# Altium PCB PCB1.PcbDoc
Units mm, origin at the board's own origin, x right, y up, seen from the top; angles counter-clockwise.
Board outline 14 x 6.25 mm, 2 copper layers (Top Layer, Bottom Layer); 3 components, 8 nets, 16 pads, 0 vias.
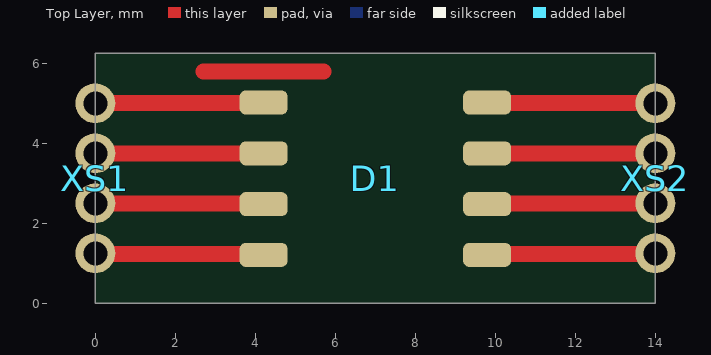
[diagram p0: Top Layer view]
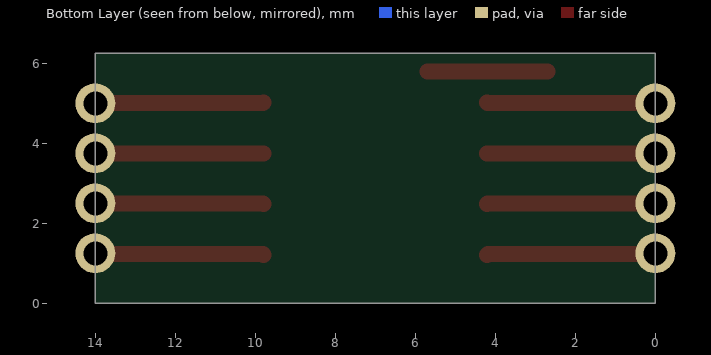
[diagram p1: Bottom Layer view, seen from below]

## Layer stack, top to bottom
Top Solder: solder mask 0.0102, Solder Resist, Dk 3.5
Top Layer: signal copper 0.0356
Dielectric 1: dielectric 0.32, FR-4, Dk 4.8
Bottom Layer: signal copper 0.0356
Bottom Solder: solder mask 0.0102, Solder Resist, Dk 3.5

## Board outline
0,0 0,6.25 14,6.25 14,0

## Design rules (kind name [scope] priority, off if disabled: settings)
Clearance [All] p1: gap=0.25 ignorepadtopadclearanceinfootprint=FALSE except(0: Arc-Hole Track-Hole SMDPad-Hole THPad-Hole Via-Hole Fill-Hole Poly-Hole Region-Hole Text-Hole)
PolygonConnect [All] p1: connectstyle=Relief reliefconductorwidth=0.254 reliefentries=4 polygonreliefangle="90 Angle" airgapwidth=0.254
RoutingVias [All] p1: holewidth=0.711 width=1.27 viastyle="Through Hole" minholewidth=0.711 minwidth=1.27 maxholewidth=0.711 maxwidth=1.27
SolderMaskExpansion [All] p1: expansion=0.102 istentingtop=FALSE
Width [All] p1: maxlimit=0.4 minlimit=0.254 preferedwidth=0.254 minimp=50.000000 maximp=50.000000 favimp=50.000000
30 further rules are at their usual default settings.

## Components (designator, comment, footprint, x,y, rotation, side; value= is the part's Value field where it differs from the comment)
D1 "ADM3485EARZ" "SO-8 (no silk)" 7,3.115 r0 top
XS1 "XS4" hole_0.6_1x4 0,5 r0 top
XS2 "XS4" hole_0.6_1x4 14,5 r0 top

## Footprints (in the part's own frame and the unit in brackets; to place one, negate y for a bottom-side part, rotate by r counter-clockwise, add the part's x,y. Pads: shape width x height; smd on the part's side, far side on the other; paste and mask are expansions set on the pad)
hole_0.6_1x4 [mm]
  round 1 hole 0.6: 1(0,0) 2(0,-1.25) 3(0,-2.5) 4(0,-3.75)
"SO-8 (no silk)" [mm]
  rrect50% 1.2x0.6 smd: 1(-2.794,1.905) 2(-2.794,0.635) 3(-2.794,-0.635) 4(-2.794,-1.905) 5(2.794,-1.905) 6(2.794,-0.635) 7(2.794,0.635) 8(2.794,1.905)

## Part data
D1: "https://www.chipdip.ru/product/adm3485earz"

## Nets (pads, with @x,y where several pads share a name; then routed paths per layer and width w, separated by ;. In a path a pad name is that pad's centre, name@x,y a point inside that pad or via, vN(x,y) a via of type N, cw(c..) or ccw(c..) an arc to the next point about the centre after c; other vN are vias at no path point)
NetD1_1: D1.1 XS1.1 | length 4.2
  Top Layer w0.4: XS1.1 0.01,5.01 4.196,5.01 D1.1
NetD1_2: D1.2 XS1.2 | length 4.2
  Top Layer w0.4: XS1.2 D1.2
NetD1_3: D1.3 XS1.3 | length 4.2
  Top Layer w0.4: XS1.3 0.01,2.49 4.196,2.49 D1.3
NetD1_4: D1.4 XS1.4 | length 4.2
  Top Layer w0.4: XS1.4 0.02,1.23 4.186,1.23 D1.4
NetD1_5: D1.5 XS2.4 | length 4.2
  Top Layer w0.4: D1.5 9.814,1.23 13.98,1.23 XS2.4
NetD1_6: D1.6 XS2.3 | length 4.2
  Top Layer w0.4: D1.6 9.804,2.49 13.99,2.49 XS2.3
NetD1_7: D1.7 XS2.2 | length 4.2
  Top Layer w0.4: D1.7 XS2.2
NetD1_8: D1.8 XS2.1 | length 4.2
  Top Layer w0.4: D1.8 9.804,5.01 13.99,5.01 XS2.1
copper on no net: | length 3
  Top Layer w0.4: 2.7,5.8 5.7,5.8

## Silkscreen, mask and mechanical layers (free items; w line width, h text height)
Mechanical 1:
  the board outline again, w0.1